# EAGLE board MFC Control Arduino I2C vs01-9 (EAGLE 7.2.0)
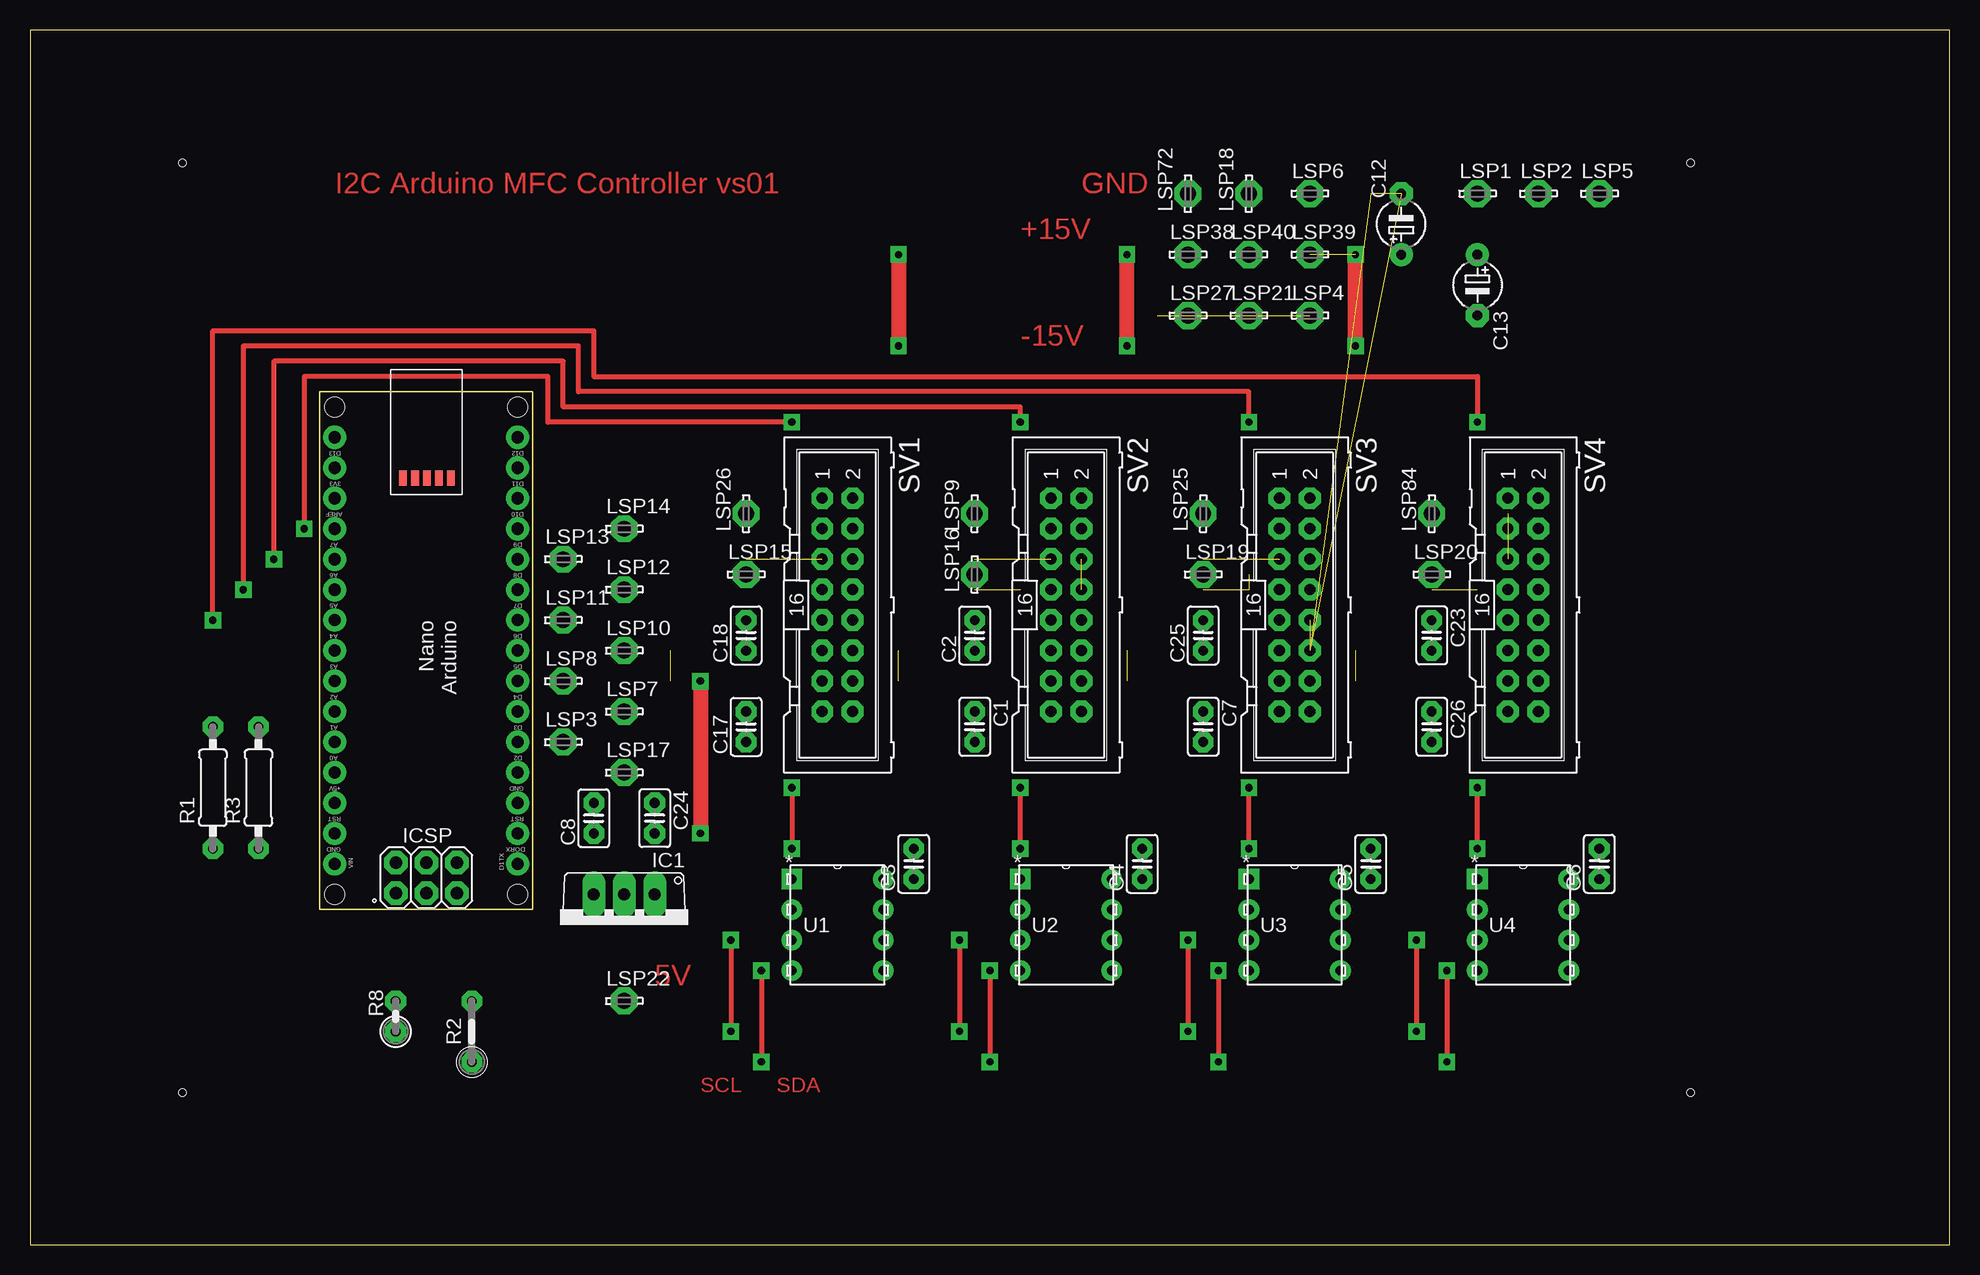
[diagram p0: board, top side]
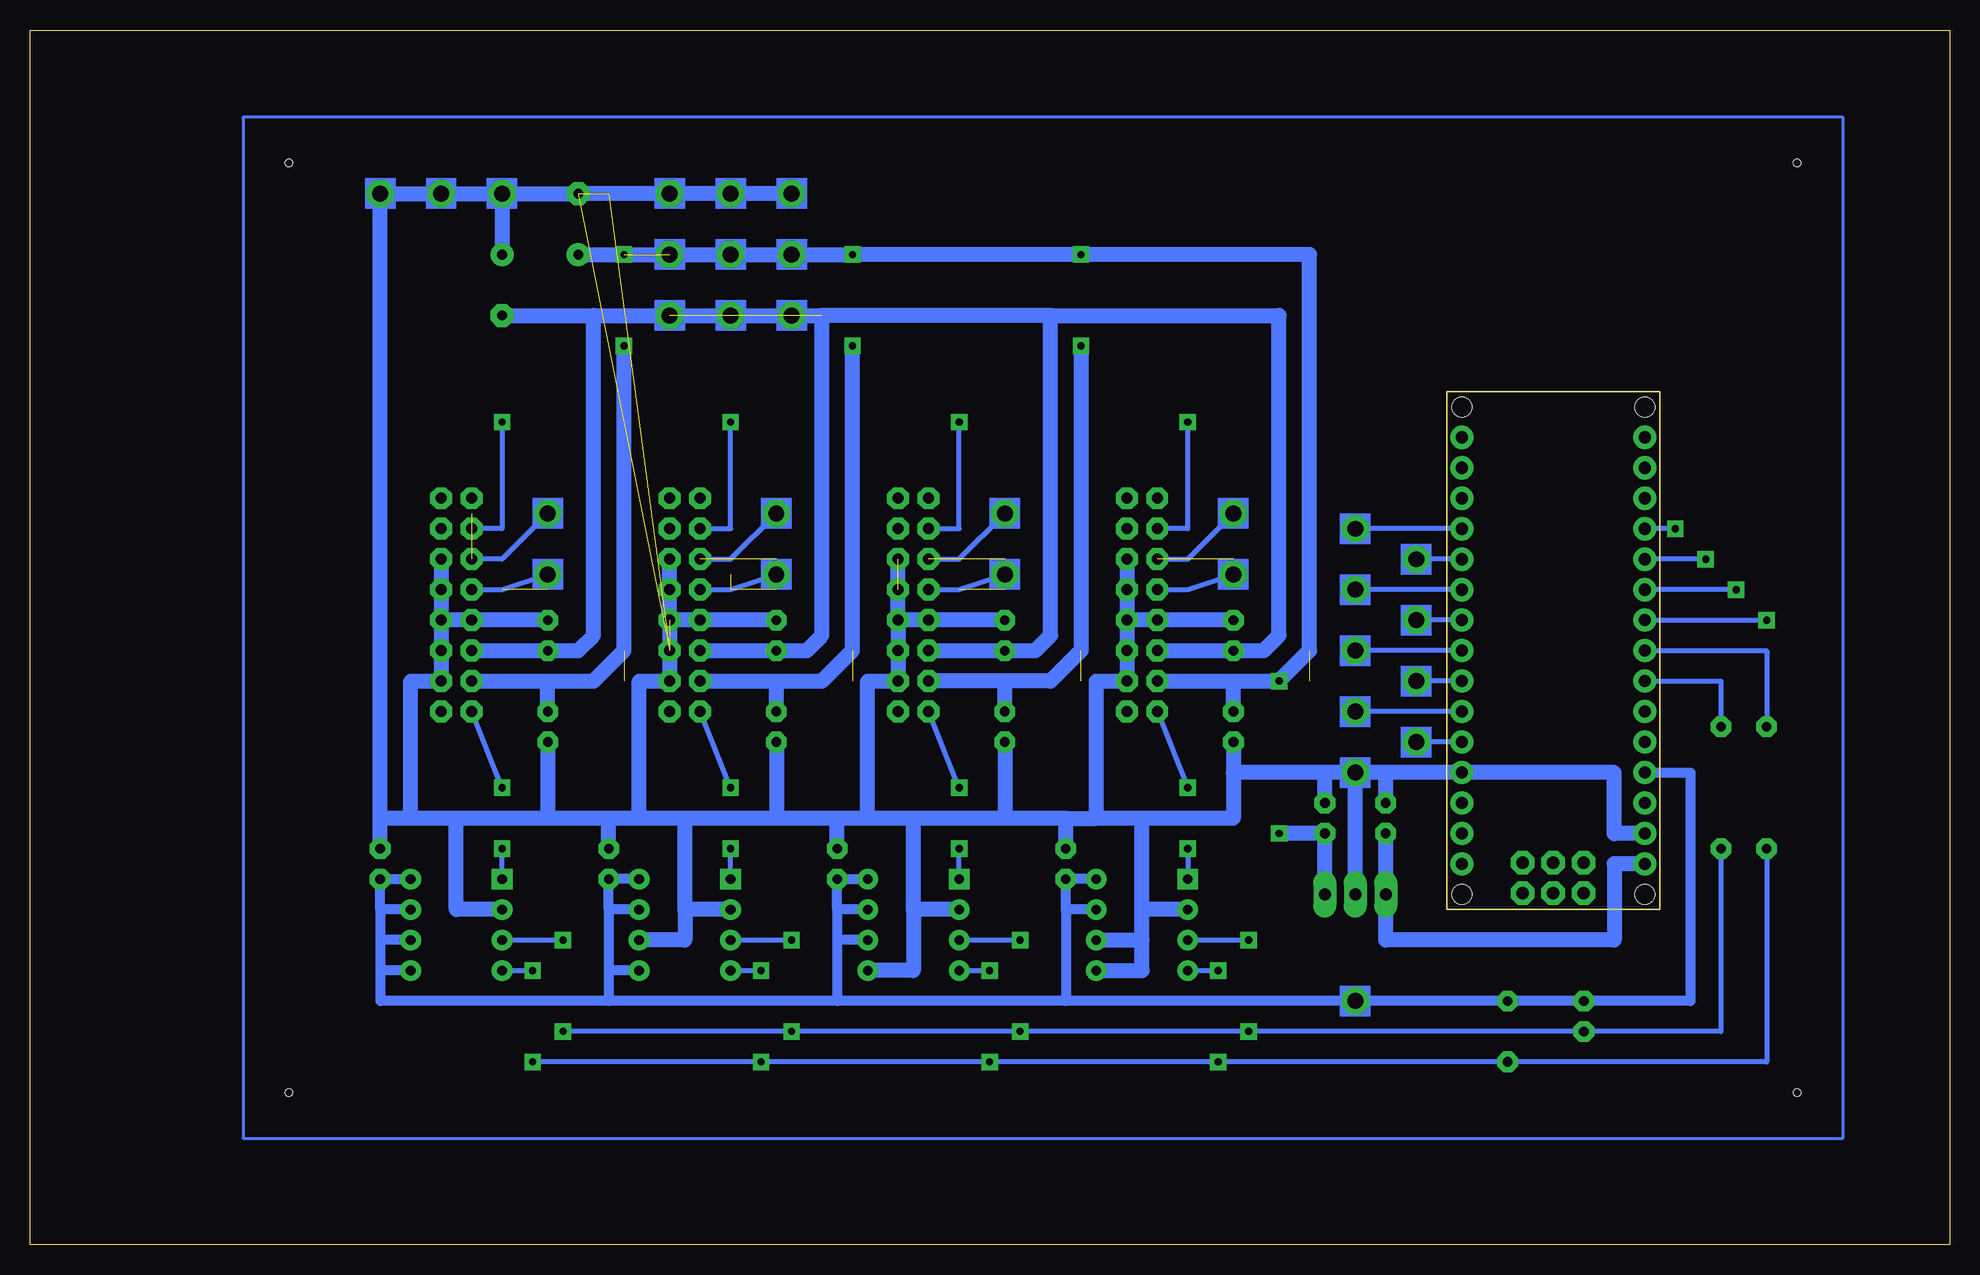
[diagram p1: board, bottom side, seen from below]

Size 160 x 101.27 mm. Coordinates in mm from the lower left corner, seen from the top.
Outline: 0,0 160,0 160,101.27 0,101.27 0,0
Copper layers (1*16): Top 0.035mm / dielectric 1.5mm / Bottom 0.035mm
Design rules "default *": minimum track width 10mil, minimum drill 24mil, track to track 8mil, track to pad 8mil, pad to pad 8mil, via to via 8mil, smd to smd 8mil, copper to edge 40mil, drill to drill 8mil, minimum pad ring 18mil, minimum via ring 15mil, stop-mask expansion 4mil, vias tented up to drill 0mil, thermal gap 10mil
Net classes: 1 Power: width 0.508 mm, clearance 0.356 mm; 3 GND: width 1.016 mm, clearance 0.356 mm
Holes 0.6 mm at 12.7,12.7 12.7,90.17 138.43,12.7 138.43,90.17

## Footprints (pad centres in the part's own frame; a part is rotated, then mirrored left to right if it is on the bottom)
C025-025X050 = drill 0.813 octagon: 1 -1.27,0; 2 1.27,0
E5-4 = drill 0.813 pad 1.905: + -2.54,0 | drill 0.813 pad 1.905 octagon: - 2.54,0
TO220V = drill 1.016 long: 1 -2.54,-2.54; 2 0,-2.54; 3 2.54,-2.54
LSP13 = drill 1.321 pad 2.159 octagon: MP 0,0
ARDUINO_NANO = drill 1.016 pad 1.778: 3V3 6.35,1.27; 5V 31.75,1.27; A0 11.43,1.27; A1 13.97,1.27; A2 16.51,1.27; A3 19.05,1.27; A4 21.59,1.27; A5 24.13,1.27; A6 26.67,1.27; A7 29.21,1.27; D2 29.21,16.51; D3 26.67,16.51; D4 24.13,16.51; D5 21.59,16.51; D6 19.05,16.51; D7 16.51,16.51; D8 13.97,16.51; D9 11.43,16.51; D10 8.89,16.51; D11 6.35,16.51; D12 3.81,16.51; D13 3.81,1.27; GND 31.75,16.51; GND. 36.83,1.27; REF 8.89,1.27; RST 34.29,16.51; RST. 34.29,1.27; RX1 36.83,16.51; TX1 39.37,16.51; VIN 39.37,1.27 | drill 1.016 pad 1.778 octagon: 5V. 39.268,6.375; GND_ 39.268,11.455; MISO 41.808,6.375; MOSI 39.268,8.915; RESET.. 41.808,11.455; SCK 41.808,8.915 | smd 1.27 x 0.635: <USB>+V 7.214,10.947; <USB>D+ 7.214,9.957; <USB>D- 7.214,8.941; <USB>GND 7.214,6.96; <USB>ID 7.214,7.976 | hole 1.651: 1.27,1.27; 1.27,16.51; 41.91,16.51; 41.91,1.27
0207/10 = drill 0.813 octagon: 1 -5.08,0; 2 5.08,0
0207/5V = drill 0.813 octagon: 1 -2.54,0; 2 2.54,0
0207/2V = drill 0.813 octagon: 1 -1.27,0; 2 1.27,0
ML16 = drill 0.914 octagon: 1 -8.89,-1.27; 2 -8.89,1.27; 3 -6.35,-1.27; 4 -6.35,1.27; 5 -3.81,-1.27; 6 -3.81,1.27; 7 -1.27,-1.27; 8 -1.27,1.27; 9 1.27,-1.27; 10 1.27,1.27; 11 3.81,-1.27; 12 3.81,1.27; 13 6.35,-1.27; 14 6.35,1.27; 15 8.89,-1.27; 16 8.89,1.27
21-0043D_8 = drill 0.813 square: 1 -7.62,7.62 | drill 0.813: 2 -7.62,5.08; 3 -7.62,2.54; 4 -7.62,0; 5 0,0; 6 0,2.54; 7 0,5.08; 8 0,7.62

## Placement (x,y rotation side)
C1  [C025-025X050]  78.74,43.18 270 top
C2  [C025-025X050]  78.74,50.8 90 top
C3  [C025-025X050]  73.66,31.75 90 top
C4  [C025-025X050]  92.71,31.75 90 top
C5  [C025-025X050]  111.76,31.75 90 top
C6  [C025-025X050]  130.81,31.75 90 top
C7  [C025-025X050]  97.79,43.18 270 top
C8  [C025-025X050]  46.99,35.56 90 top
C12  10µF  [E5-4]  114.3,85.09 90 top
C13  10µF  [E5-4]  120.65,80.01 270 top
C17  [C025-025X050]  59.69,43.18 90 top
C18  [C025-025X050]  59.69,50.8 90 top
C23  [C025-025X050]  116.84,50.8 270 top
C24  [C025-025X050]  52.07,35.56 270 top
C25  [C025-025X050]  97.79,50.8 90 top
C26  [C025-025X050]  116.84,43.18 270 top
IC1  7812TV  [TO220V]  49.53,26.67 180 top
LSP1  LSP13  [LSP13]  120.65,87.63 0 top
LSP2  LSP13  [LSP13]  125.73,87.63 0 top
LSP3  LSP13  [LSP13]  44.45,41.91 0 top
LSP4  LSP13  [LSP13]  106.68,77.47 0 top
LSP5  LSP13  [LSP13]  130.81,87.63 0 top
LSP6  LSP13  [LSP13]  106.68,87.63 0 top
LSP7  LSP13  [LSP13]  49.53,44.45 0 top
LSP8  LSP13  [LSP13]  44.45,46.99 0 top
LSP9  LSP13  [LSP13]  78.74,60.96 90 top
LSP10  LSP13  [LSP13]  49.53,49.53 0 top
LSP11  LSP13  [LSP13]  44.45,52.07 0 top
LSP12  LSP13  [LSP13]  49.53,54.61 0 top
LSP13  LSP13  [LSP13]  44.45,57.15 0 top
LSP14  LSP13  [LSP13]  49.53,59.69 0 top
LSP15  LSP13  [LSP13]  59.69,55.88 0 top
LSP16  LSP13  [LSP13]  78.74,55.88 90 top
LSP17  LSP13  [LSP13]  49.53,39.37 0 top
LSP18  LSP13  [LSP13]  101.6,87.63 90 top
LSP19  LSP13  [LSP13]  97.79,55.88 0 top
LSP20  LSP13  [LSP13]  116.84,55.88 0 top
LSP21  LSP13  [LSP13]  101.6,77.47 0 top
LSP22  LSP13  [LSP13]  49.53,20.32 0 top
LSP25  LSP13  [LSP13]  97.79,60.96 90 top
LSP26  LSP13  [LSP13]  59.69,60.96 90 top
LSP27  LSP13  [LSP13]  96.52,77.47 0 top
LSP38  LSP13  [LSP13]  96.52,82.55 0 top
LSP39  LSP13  [LSP13]  106.68,82.55 0 top
LSP40  LSP13  [LSP13]  101.6,82.55 0 top
LSP72  LSP13  [LSP13]  96.52,87.63 90 top
LSP84  LSP13  [LSP13]  116.84,60.96 90 top
PCB1  ARDUINO_NANO  [ARDUINO_NANO]  24.13,71.12 270 top
R1  330R  [0207/10]  15.24,38.1 90 top
R2  10k  [0207/5V]  36.83,17.78 90 top
R3  330R  [0207/10]  19.05,38.1 90 top
R8  10k  [0207/2V]  30.48,19.05 90 top
SV1  [ML16]  67.31,53.34 270 top
SV2  [ML16]  86.36,53.34 270 top
SV3  [ML16]  105.41,53.34 270 top
SV4  [ML16]  124.46,53.34 270 top
U1  MAX517ACPA+  [21-0043D_8]  71.12,22.86 0 top
U2  MAX517ACPA+  [21-0043D_8]  90.17,22.86 0 top
U3  MAX517ACPA+  [21-0043D_8]  109.22,22.86 0 top
U4  MAX517ACPA+  [21-0043D_8]  128.27,22.86 0 top

## Library data of the parts
C1-C8 C12 C13 C17 C18 C23-C26 R1-R3 R8 = rcl
IC1 = linear
LSP1-LSP22 LSP25-LSP27 LSP38-LSP40 LSP72 LSP84 = solpad
PCB1 = E14_Arduino_published
SV1-SV4 = con-harting-ml; OC_FARNELL: unknown; OC_NEWARK: unknown
U1-U4 = MAX517; MANUFACTURER_PART_NUMBER: MAX517ACPA+; VENDOR: MAXIM

## Nets
GND [GND]: C1.2 C2.2 C3.2 C4.2 C5.2 C6.2 C7.2 C8.2 C12.- C13.+ C17.1 C18.2 C23.1 C24.1 C25.2 C26.2 IC1.2 LSP1.MP LSP2.MP LSP5.MP LSP6.MP LSP17.MP LSP18.MP LSP72.MP PCB1.GND PCB1.GND. SV1.6 SV1.8 SV1.9 SV1.10 SV1.12 SV1.14 SV2.6 SV2.8 SV2.9 SV2.10 SV2.12 SV2.14 SV3.6 SV3.8 SV3.9 SV3.10 SV3.12 SV3.14 SV4.6 SV4.8 SV4.9 SV4.10 SV4.12 SV4.14 U1.2 U1.5 U1.6 U2.2 U2.5 U3.2 U3.6 U4.2
N$1: LSP3.MP PCB1.D2
N$2: LSP7.MP PCB1.D3
N$3: LSP8.MP PCB1.D4
N$4: PCB1.A0 SV1.3
N$5: PCB1.A1 SV2.3
N$6: PCB1.A3 SV4.3
N$7: PCB1.A2 SV3.3
N$8: SV2.15 U2.1
N$9: LSP26.MP SV1.5
N$10: LSP9.MP SV2.5
N$11: LSP25.MP SV3.5
N$12: LSP84.MP SV4.5
N$13: PCB1.A4 R1.2
N$14: LSP10.MP PCB1.D5
N$15: SV1.15 U1.1
N$16: R1.1 R2.1 U1.4 U2.4 U3.4 U4.4
N$17: SV3.15 U3.1
N$18: PCB1.A5 R3.2
N$19: LSP11.MP PCB1.D6
N$20: SV4.15 U4.1
N$21: C3.1 C4.1 C5.1 C6.1 LSP22.MP PCB1.5V R2.2 R8.2 U1.7 U1.8 U2.6 U2.7 U2.8 U3.5 U3.7 U3.8 U4.5 U4.6 U4.7 U4.8
N$22: R3.1 R8.1 U1.3 U2.3 U3.3 U4.3
N$23: LSP12.MP PCB1.D7
N$24: LSP13.MP PCB1.D8
N$25: LSP14.MP PCB1.D9
N$26: C8.1 IC1.3 PCB1.VIN
N$28: LSP16.MP SV2.7
N$29: LSP15.MP SV1.7
N$30: LSP19.MP SV3.7
N$31: LSP20.MP SV4.7
V+ [Power]: C1.1 C7.1 C12.+ C17.2 C24.2 C26.1 IC1.1 LSP38.MP LSP39.MP LSP40.MP SV1.13 SV2.13 SV3.13 SV4.13
V-: C2.1 C13.- C18.1 C23.2 C25.1 LSP4.MP LSP21.MP LSP27.MP SV1.11 SV2.11 SV3.11 SV4.11

## Tracks (layer width: path | path; a pad name or v marks a point on that pad's centre or on a via)
GND  (5 unrouted)
  Bottom 1.27: SV2.10 SV2.9 C2.2 | SV1.6 SV1.8 SV1.10 | SV1.10 SV1.12 SV1.14 71.12,46.99 71.12,35.56 | SV1.10 SV1.9 C18.2 | SV2.10 SV2.6 | SV2.10 SV2.12 SV2.14 90.17,46.99 90.17,35.56 | SV3.10 SV3.9 C25.2 | SV3.10 SV3.8 SV3.6 | SV3.10 SV3.14 109.22,46.99 109.22,35.56 | SV4.6 SV4.8 SV4.10 | SV4.10 SV4.12 SV4.14 128.27,46.99 128.27,35.56 | SV4.10 SV4.9 C23.1 | 67.31,35.56 59.69,35.56 59.69,39.37 | 73.66,35.56 78.74,35.56 | 78.74,35.56 86.36,35.56 | 86.36,35.56 90.17,35.56 | 90.17,35.56 92.71,35.56 | 92.71,35.56 97.79,35.56 | 97.79,35.56 105.41,35.56 | 109.22,35.56 111.76,35.56 | 111.76,35.56 116.84,35.56 | 116.84,35.56 124.46,35.56 | 124.46,35.56 128.27,35.56 | U1.2 67.31,27.94 | 67.31,27.94 67.31,35.56 | 67.31,35.56 71.12,35.56 | U4.2 124.46,27.94 124.46,35.56 | U3.2 105.41,27.94 | 105.41,27.94 105.41,35.56 | 105.41,35.56 109.22,35.56 | U2.2 86.36,27.94 | 86.36,27.94 86.36,35.56 | U1.6 67.31,25.4 | 67.31,25.4 67.31,27.94 | U1.5 67.31,22.86 67.31,25.4 | C3.2 73.66,35.56 | 73.66,35.56 71.12,35.56 | 128.27,35.56 130.81,35.56 | 130.81,35.56 LSP5.MP LSP2.MP LSP1.MP | LSP1.MP C13.+ | C1.2 78.74,35.56 | C7.2 97.79,35.56 | C26.2 116.84,35.56 | PCB1.GND. 27.94,34.29 27.94,39.37 PCB1.GND 46.99,39.37 | C17.1 59.69,39.37 | C8.2 46.99,39.37 | C4.2 92.71,35.56 | C5.2 111.76,35.56 | C6.2 130.81,35.56 | 86.36,27.94 86.36,22.86 U2.5 | 105.41,27.94 105.41,25.4 U3.6 | 46.99,39.37 LSP17.MP | 52.07,39.37 59.69,39.37 | C24.1 52.07,39.37 | LSP17.MP 52.07,39.37 | IC1.2 LSP17.MP | LSP72.MP LSP18.MP LSP6.MP C12.- LSP1.MP
N$1
  Bottom 0.406: PCB1.D2 LSP3.MP
N$2
  Bottom 0.406: PCB1.D3 LSP7.MP
N$3
  Bottom 0.406: PCB1.D4 LSP8.MP
N$4  (via drill 0.6)
  Top 0.406: v63.5,68.58 43.18,68.58 43.18,72.39 22.86,72.39 v22.86,59.69
  Bottom 0.406: SV1.3 63.5,59.69 v63.5,68.58 | v22.86,59.69 PCB1.A0
N$5  (via drill 0.6)
  Top 0.406: v82.55,68.58 82.55,69.85 44.45,69.85 44.45,73.66 20.32,73.66 v20.32,57.15
  Bottom 0.406: SV2.3 82.55,59.69 v82.55,68.58 | v20.32,57.15 PCB1.A1
N$6  (via drill 0.6)
  Top 0.406: v15.24,52.07 15.24,76.2 46.99,76.2 46.99,72.39 120.65,72.39 v120.65,68.58
  Bottom 0.406: PCB1.A3 v15.24,52.07 | v120.65,68.58 120.65,59.69 SV4.3
N$7  (via drill 0.6)
  Top 0.406: v101.6,68.58 101.6,71.12 45.72,71.12 45.72,74.93 17.78,74.93 v17.78,54.61
  Bottom 0.406: SV3.3 101.6,59.69 v101.6,68.58 | v17.78,54.61 PCB1.A2
N$8  (via drill 0.6)
  Top 0.406: v82.55,33.02 v82.55,38.1
  Bottom 0.406: U2.1 v82.55,33.02 | v82.55,38.1 SV2.15
N$9  (1 unrouted)
  Bottom 0.406: SV1.5 63.5,57.15 LSP26.MP
N$10  (1 unrouted)
  Bottom 0.406: SV2.5 82.55,57.15 LSP9.MP
N$11  (1 unrouted)
  Bottom 0.406: SV3.5 101.6,57.15 LSP25.MP
N$12  (1 unrouted)
  Bottom 0.406: LSP84.MP 120.65,57.15 SV4.5
N$13
  Bottom 0.406: PCB1.A4 15.24,49.53 R1.2
N$14
  Bottom 0.406: PCB1.D5 LSP10.MP
N$15  (via drill 0.6)
  Top 0.406: v63.5,38.1 v63.5,33.02
  Bottom 0.406: SV1.15 v63.5,38.1 | v63.5,33.02 U1.1
N$16  (via drill 0.6)
  Top 0.406: v60.96,22.86 v60.96,15.24 | v80.01,22.86 v80.01,15.24 | v99.06,22.86 v99.06,15.24 | v118.11,22.86 v118.11,15.24
  Bottom 0.406: R1.1 15.24,15.24 R2.1 v60.96,15.24 v80.01,15.24 v99.06,15.24 v118.11,15.24 | U1.4 v60.96,22.86 | U2.4 v80.01,22.86 | U3.4 v99.06,22.86 | U4.4 v118.11,22.86
N$17  (via drill 0.6)
  Top 0.406: v101.6,33.02 v101.6,38.1
  Bottom 0.406: U3.1 v101.6,33.02 | v101.6,38.1 SV3.15
N$18
  Bottom 0.406: PCB1.A5 19.05,46.99 R3.2
N$19
  Bottom 0.406: PCB1.D6 LSP11.MP
N$20  (via drill 0.6)
  Top 0.406: v120.65,33.02 v120.65,38.1
  Bottom 0.406: U4.1 v120.65,33.02 | v120.65,38.1 SV4.15
N$21
  Bottom 0.813: PCB1.5V 21.59,39.37 21.59,20.32 R8.2 R2.2 LSP22.MP 73.66,20.32 | 73.66,20.32 92.71,20.32 | 92.71,20.32 111.76,20.32 | 111.76,20.32 130.81,20.32 130.81,22.86 | U2.7 92.71,27.94 | 92.71,27.94 92.71,25.4 | 92.71,25.4 92.71,20.32 | U3.7 111.76,27.94 | 111.76,27.94 111.76,22.86 | 111.76,22.86 111.76,20.32 | U4.7 130.81,27.94 | 130.81,27.94 130.81,25.4 | 130.81,25.4 130.81,22.86 | U1.7 73.66,27.94 | 73.66,27.94 73.66,20.32 | 73.66,27.94 C3.1 U1.8 | 92.71,27.94 C4.1 U2.8 | 111.76,27.94 C5.1 U3.8 | 130.81,27.94 C6.1 U4.8 | U4.6 130.81,25.4 | U4.5 130.81,22.86 | U3.5 111.76,22.86 | U2.6 92.71,25.4
N$22  (via drill 0.6)
  Top 0.406: v58.42,25.4 v58.42,17.78 | v77.47,25.4 v77.47,17.78 | v96.52,25.4 v96.52,17.78 | v115.57,25.4 v115.57,17.78
  Bottom 0.406: R3.1 19.05,17.78 R8.1 v58.42,17.78 v77.47,17.78 v96.52,17.78 v115.57,17.78 | U1.3 v58.42,25.4 | U2.3 v77.47,25.4 | U3.3 v96.52,25.4 | U4.3 v115.57,25.4
N$23
  Bottom 0.406: PCB1.D7 LSP12.MP
N$24
  Bottom 0.406: PCB1.D8 LSP13.MP
N$25
  Bottom 0.406: PCB1.D9 LSP14.MP
N$26
  Bottom 1.27: PCB1.VIN 27.94,31.75 27.94,25.4 46.99,25.4 IC1.3 C8.1
N$27
  Bottom 0.254: 8.89,93.98 8.89,8.89 142.24,8.89 142.24,93.98 8.89,93.98
N$28  (1 unrouted)
  Bottom 0.406: SV2.7 82.55,54.61 LSP16.MP
N$29
  Bottom 0.406: SV1.7 63.5,54.61 LSP15.MP
N$30  (2 unrouted)
  Bottom 0.406: SV3.7 101.6,54.61 LSP19.MP
N$31  (1 unrouted)
  Bottom 0.406: SV4.7 120.65,54.61 LSP20.MP
V+  (via drill 0.6)  (5 unrouted)
  Top 1.27: v72.39,82.55 v72.39,74.93 | v91.44,74.93 v91.44,82.55 | v110.49,74.93 v110.49,82.55 | v55.88,46.99 v55.88,34.29
  Bottom 0.406: LSP38.MP LSP40.MP v91.44,82.55
  Bottom 1.27: IC1.1 C24.2 v55.88,34.29 | v72.39,74.93 72.39,49.53 74.93,46.99 78.74,46.99 | 78.74,46.99 SV2.13 | SV3.13 97.79,46.99 | 97.79,46.99 93.98,46.99 91.44,49.53 v91.44,74.93 | SV4.13 116.84,46.99 | 116.84,46.99 113.03,46.99 110.49,49.53 v110.49,74.93 | SV1.13 59.69,46.99 | 59.69,46.99 v55.88,46.99 53.34,49.53 53.34,82.55 v72.39,82.55 v91.44,82.55 v110.49,82.55 C12.+ | C17.2 59.69,46.99 | C7.1 97.79,46.99 | C26.1 116.84,46.99 | C1.1 78.74,46.99
V-  (3 unrouted)
  Bottom 1.27: SV2.11 C2.1 76.2,49.53 74.93,50.8 74.93,77.47 | 74.93,77.47 55.88,77.47 55.88,50.8 57.15,49.53 C18.1 SV1.11 | SV3.11 C25.1 95.25,49.53 93.98,50.8 93.98,77.47 | 74.93,77.47 93.98,77.47 | SV4.11 C23.2 114.3,49.53 113.03,50.8 113.03,77.47 | 113.03,77.47 93.98,77.47 | C13.- 113.03,77.47
(copper drawn outside any net)
  shapes: Bottom area x30

## Text on the board
Top: I2C Arduino MFC Controller vs01 | GND | +15V | -15V | 5V | SCL | SDA